# Altium PCB PCB1.PcbDoc (part 2 of 2)
Units mm, origin at the board's own origin, x right, y up, seen from the top; angles counter-clockwise.
Board outline 75.15 x 101.5 mm, 2 copper layers (Top Layer, Bottom Layer); 114 components, 101 nets, 345 pads, 36 vias.
Unrouted connection lines stored in the file: 145.
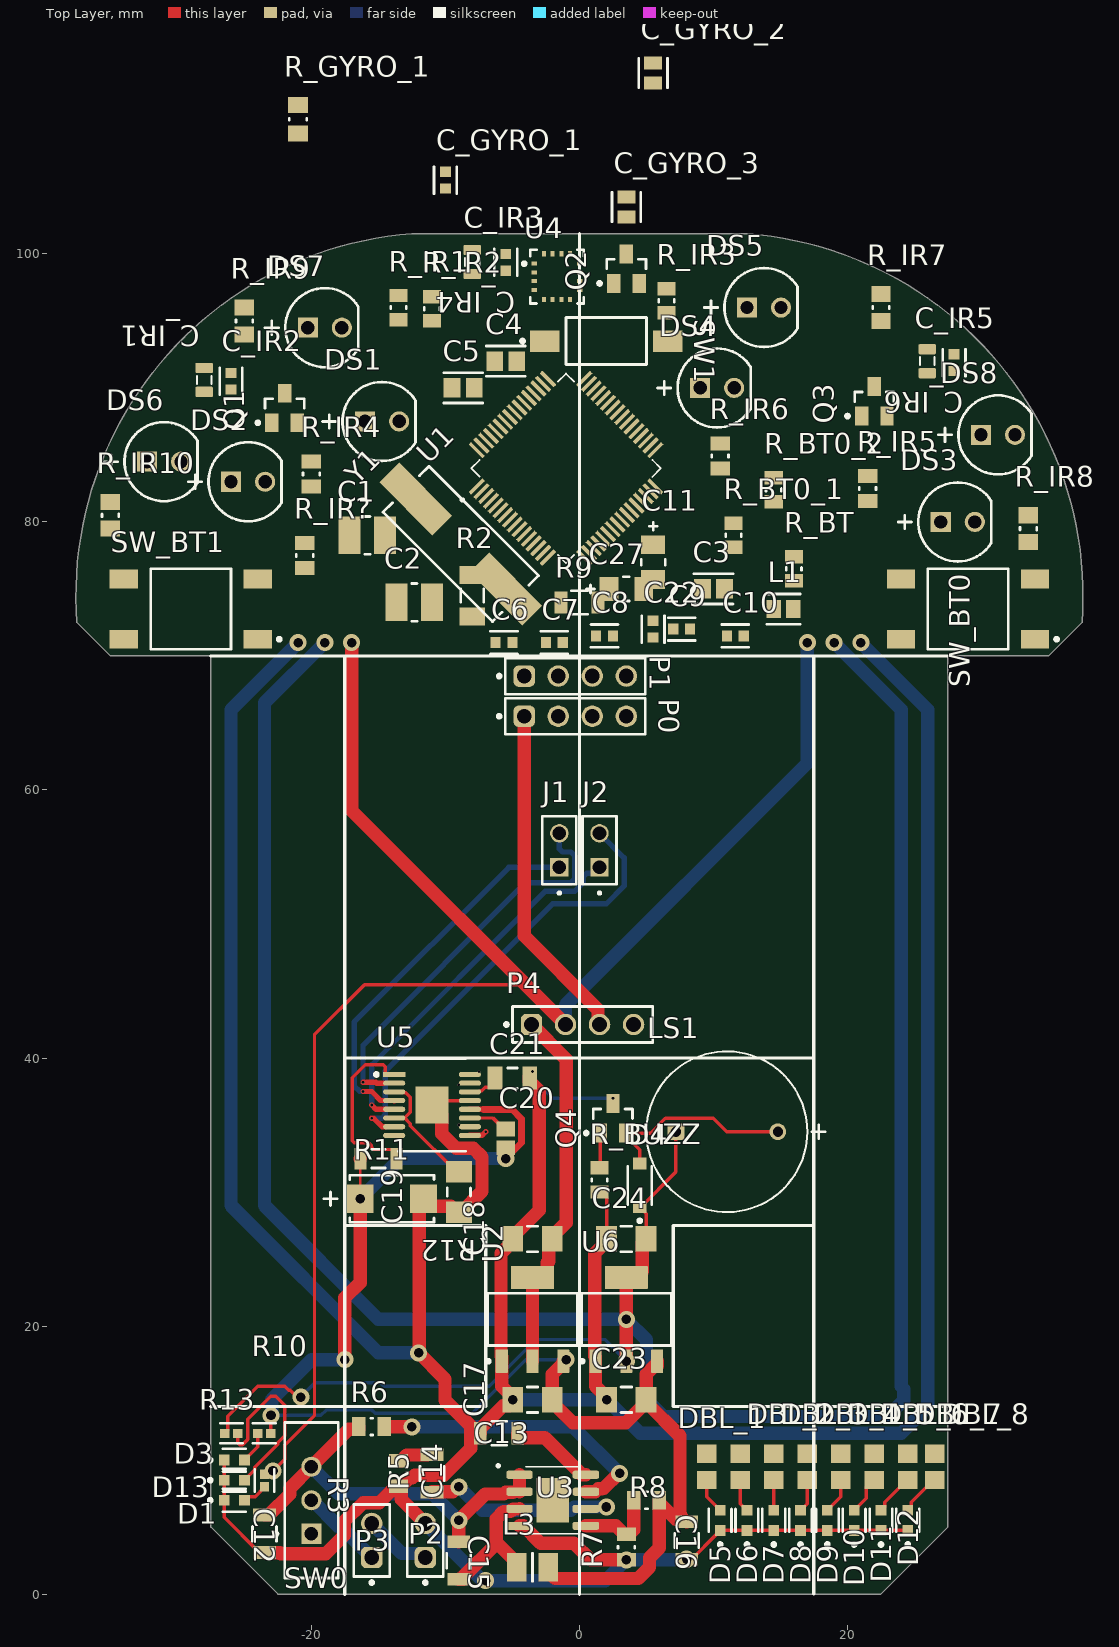
[diagram p0: Top Layer view]

## Via types
v1: diameter 1.27/1.27 (per signal layer), hole 0.711, Top Layer to Bottom Layer, 26 vias
v2: diameter 0.2/0.2 (per signal layer), hole 0.2, Top Layer to Bottom Layer, 10 vias

## Nets (pads, with @x,y where several pads share a name; then routed paths per layer and width w, separated by ;. In a path a pad name is that pad's centre, name@x,y a point inside that pad or via, vN(x,y) a via of type N, cw(c..) or ccw(c..) an arc to the next point about the centre after c; other vN are vias at no path point) (continued)
NetD1_2: (continued)
  Top Layer w0.254: D1.2 -24.727,7.273 -24.206,7.273 -23.5,7.979 R3.2
NetD3_2: D3.2 R10.2 | length 2.4
  Top Layer w0.254: D3.2 -24,11 R10.2
NetD4_2: D4.2 LS1.2 Q4.2 | length 14.9
  Top Layer w0.254: D4.2 4.5,33.15 3.45,34.2 Q4.2 5.311,34.4 6.417,35.506 9.971,35.506 10.977,34.5 LS1.2
NetD5_2: D5.2 DBL_1.1 | length 2.7
  Top Layer w0.254: DBL_1.1 9.5,7.25 D5.2
NetD6_2: D6.2 DBL_2.1 | length 2.5
  Top Layer w0.254: DBL_2.1 12,6.75 D6.2
NetD7_2: D7.2 DBL_3.1 | length 2.3
  Top Layer w0.254: D7.2 DBL_3.1
NetD8_2: D8.2 DBL_4.1 | length 2.5
  Top Layer w0.254: D8.2 17,6.75 DBL_4.1
NetD9_2: D9.2 DBL_5.1 | length 2.7
  Top Layer w0.254: D9.2 19.5,7.25 DBL_5.1
NetD10_2: D10.2 DBL_6.1 | length 2.9
  Top Layer w0.254: D10.2 21.402,7.152 21.402,7.977 21.95,8.525 DBL_6.1
NetD11_2: D11.2 DBL_7.1 | length 3.1
  Top Layer w0.254: D11.2 22.773,6.523 22.773,6.848 24.45,8.525 DBL_7.1
NetD12_2: D12.2 DBL_8.1 | length 3.1
  Top Layer w0.254: D12.2 24.773,6.523 24.773,6.848 26.45,8.525 DBL_8.1
NetD13_2: D13.2 R13.2 | length 13.8
  Top Layer w0.254: R13.2 -25.5,11.283 -25.351,11.134 -25.141,11.134 -24.739,11.536 -24.739,13.043 -23.032,14.749 -22.657,14.749 -22,14.092 -22,11.81 -22.508,11.302 -22.508,11.182 -24.217,9.473 -24.217,9.283 D13.2
NetDS1_2: DS1.2 R_IR4.2
NetDS2_2: DS2.2 R_IR?.2
NetDS3_2: DS3.2 R_IR5.2
NetDS4_2: DS4.2 R_IR6.2
NetLabel18: U1.22
NetLabel19: U1.23
NetLabel20: U1.41
NetLabel23: U1.21 U1.44
NetLabel24: U1.45
NetLabel27: U1.50
NetLabel28: U1.26
NetLabel31: U1.55
NetLabel44: U1.54
NetLabel45: U1.4
NetLabel46: U1.3
NetLabel47: U1.2
NetLabel48: U1.53
NetLabel49: U1.52
NetLabel50: U1.51
NetLabel51: U1.40
NetLabel52: U1.39
NetLabel53: U1.38
NetP2_1: P2.1 P3.2 | length 5.1
  Bottom Layer w1: P3.2 -13.26,3.03 -11.8,3.03 P2.1
NetP3_1: P3.1 SW0.2 | length 6.3
  Bottom Layer w1: SW0.2 -19.934,7 -17.901,4.967 -17.737,4.967 P3.1
NetQ1_2: Q1.2 R_IR4.1
NetQ2_2: Q2.2 R_IR5.1 R_IR?.1
NetQ3_2: Q3.2 R_IR6.1
NetR6_2: R6.2 U3.7 | length 22.1
  Top Layer w1: R6.2 -14.549,12.495 -14.546,12.492 -12.508,12.492 v1(-12.5,12.484) ; U3.7 0.491,7.651 1.189,7.651 1.389,7.851 1.684,7.851 1.721,7.887 1.814,7.887 2.927,9 v1(3,9)
  Bottom Layer w1: v1(-12.5,12.484) -12.484,12.5 -0.5,12.5 v1(3,9)
NetR7_2: R7.2 R8.2 U3.5 | length 6.2
  Top Layer w1: U3.5 2.71,5.095 3.296,4.509 3.296,4.454 3.704,4.454 4.049,4.799 R8.2
NetR11_2: R11.2 U5.1 | length 13
  Top Layer w0.254: U5.1 -14.421,38.775 -14.484,38.838 -14.484,39.351 -14.633,39.5 -16,39.5 -16.958,38.542 -16.958,33.83 -16.809,33.681 -15.742,33.681 -15.519,33.458 -15.519,33.322 -15.37,33.173 -13.973,33.173 -13.65,32.85 R11.2
NetR12_1: R12.1 U5.3 U5.6 | length 9.6
  Top Layer w0.254: U5.6 -13.03,35.525 -12.611,35.106 -12.611,34.936 -9.175,31.5 R12.1 ; U5.3 -13.154,37.475 -13.075,37.396 -13.02,37.396 -12.951,37.396 -12.617,37.062 -12.617,35.938 -12.951,35.604
NetR_BT0_1_2: R_BT0_1.2 SW_BT0.4
NetR_BT0_2_2: R_BT0_2.2 SW_BT0.3
OUT1: J1.01 U5.4 | length 28.3
  Top Layer w0.4: v2(-16.154,37.5) -15.5,37.5 -14.831,36.831 -13.831,36.831 U5.4
  Bottom Layer w0.4: v2(-16.154,37.5) -16.387,37.5 -16.808,37.921 -16.808,42.692 -5.27,54.23 J1.01
OUT2: J1.02 U5.2 | length 30.3
  Top Layer w0.254: U5.2@-14.625,38.125 U5.2
  Top Layer w0.4: v2(-16.154,38.192) -15.192,38.192 -15.125,38.125 U5.2@-14.625,38.125
  Bottom Layer w0.4: v2(-16.154,38.192) -16.154,40.949 -4.012,53.091 -0.627,53.091 -0.361,53.357 -0.361,54.884 -0.361,55.103 -0.627,55.369 -1.266,55.369 -1.5,55.603 J1.02
OUT3: J2.01 U5.5 | length 27.5
  Top Layer w0.4: v2(-15.5,36.5) -15.169,36.169 U5.5@-14.483,36.169
  Bottom Layer w0.4: v2(-15.5,36.5) -15.5,39.5 -2.563,52.437 -0.356,52.437 0.293,53.086 0.293,53.55 0.527,53.784 1.054,53.784 J2.01
OUT4: J2.02 U5.7 | length 34.6
  Top Layer w0.254: U5.7@-14.472,34.881 -13.831,34.881 U5.7
  Top Layer w0.4: v2(-15.5,35.5) -15.349,35.5 -14.73,34.881 U5.7@-14.472,34.881
  Bottom Layer w0.4: v2(-15.5,35.5) -14.734,35.5 -14.5,35.734 -14.5,39 -2,51.5 2,51.5 3.334,52.834 3.334,54.936 J2.02
PB2: R9.1 U1.28
R_RV: DS8.2 R_IR8.2 U1.9
RF_EM: Q3.1 R_IR3.1 U1.37
RF_RV: DS5.2 R_IR7.2 U1.11
RX: P1.3 U1.43
SCL: U1.58 U4.2
SDA: U1.59 U4.3
SWCLK: P0.3 U1.49
SWDIO: P0.2 U1.46
TX: P1.2 U1.42
V33: C24.1 C_GYRO_1.1 C_IR1.1 C_IR2.2 C_IR3.2 C_IR4.1 C_IR5.2 C_IR6.1 D4.1 DS1.1 DS2.1 DS3.1 DS4.1 DS5.1 DS6.1 DS7.1 DS8.1 LS1.1 R13.1 SW_BT0.1 SW_BT0.2 SW_BT1.2 U4.1 U4.5 U4.15 U4.16 U6.2 U6.4 | length 214.5
  Top Layer w0.254: R13.1 -26.448,12 -26.239,12.209 -26.239,13.261 -24,15.5 -22,15.5 -21.702,15.202 -21.573,15.202 -21.065,14.694 v1(-20.79,14.694) ; D4.1 D4.1@4.57,28.865 ; C24.1 4.976,28.389 4.883,28.482 4.883,28.552 D4.1@4.57,28.865 ; LS1.1 7.2,31.495 D4.1@4.57,28.865
  Top Layer w1: v1(3.5,17.375) v1(3.5,20.5) U6.4 4.225,23.625 4.698,24.098 4.698,26.223 C24.1
  Bottom Layer w0.254: v1(-20.79,14.694) -20.79,14.71 -19.735,15.765 -14.854,15.765 -14.589,15.5 -6.718,15.5 -3.218,19 1.875,19 v1(3.5,17.375)
  Bottom Layer w1: v1(-19,71) -23.5,66.5 -23.5,29 -15,20.5 v1(3.5,20.5) 3.5,20.481 5,18.981 5,14.5 6.246,13.254 23,13.254 24.209,14.463 24.209,15.291 24,15.5 24,66 v1(19,71)
VDD3: C6.1 C7.1 C8.1 C9.1 L1.1
VDD33: C4.1 C5.1 P1.1 P4.2 R2.1 R3.1 U1.14 U1.19 U1.32 U1.48 U1.64 | length 122.2
  Top Layer w0.254: v1(-22.867,9.196) -22,10.063 -22,11.092 -19.774,13.318 -19.774,41.726 -16.04,45.46 -4,45.46
  Top Layer w1: v1(-17,71) -17,58.46 P4.2
  Bottom Layer w1: P4.2 -1.04,43.96 17,62 v1(17,71)
VDD33_OUT: C18.1 P4.1 U2.2 U2.4 | length 27.7
  Top Layer w1: P4.1 -1,39.92 -1,27.7 -2.302,26.398 -2.302,24.823 -2.4,24.725 -2.4,24 -2.775,23.625 U2.4 U2.2
VDD33ST: P0.1 P4.3 | length 25.3
  Top Layer w1: P0.1 -4.12,49.12 1.385,43.615 1.385,42.615 P4.3
VDDA: C10.1 C22.1 L1.2 U1.56
VIN74: C12.1 C15.1 R6.1 SW0.3 U3.1 U3.2 | length 30.6
  Top Layer w1: C12.1 -23.175,5.9 -21.623,7.452 -21.623,7.877 SW0.3 -17.204,12.296 -16.454,12.296 -16.451,12.299 R6.1 ; C15.1 v1(-9,5.5) -7.033,7.467 -5.65,7.467 -5.514,7.603 U3.2@-4.96,7.603 ; U3.2 U3.1
  Bottom Layer w1: SW0.3 -17.978,7.478 -10.978,7.478 v1(-9,5.5)
VOUT5: C16.1 C17.1 C19.2 C20.1 C23.1 L3.2 R8.1 R10.1 R11.1 U2.3 U5.12 U6.3 | length 109.3
  Top Layer w0.2: v1(-16.36,29.5) R11.1@-16.36,32.49
  Top Layer w0.254: R10.1 -23.029,12.013 -23.029,13.315 v1(-23.016,13.329)
  Top Layer w0.4: U5.12 -7.175,36.175
  Top Layer w0.5: -7.175,36.175 -7.156,36.156 -5.018,36.156 -4.321,35.459 -4.321,33.679 v1(-5.5,32.5)
  Top Layer w1: v1(-17.5,17.5) -17.5,22.106 -16.36,23.246 v1(-16.36,29.5) ; R11.1@-16.355,32.495 R11.1 ; L3.2 -2.324,1.674 -1.81,1.16 4.385,1.16 5.224,1.999 5.224,2.715 5.951,3.442 R8.1 5.951,6.799 C16.1@7.175,5.575 ; U2.3 -1.2,17.05 -1.25,17 -1.438,17 -2.024,16.414 C17.1 -2.024,14.324 -0.493,12.793 3.444,12.793 4.976,14.324 7.5,11.8 7.5,5.9 C16.1@7.65,5.75 ; C23.1 4.976,16.414 5.562,17 5.75,17 5.8,17.05 U6.3 ; C16.1@7.5,5.425 7.975,5.425 C16.1
  Bottom Layer w0.254: v1(-23.016,13.329) -23,13.345 -19.296,13.345 -18.908,13.733 -15.479,13.733 -15.246,13.5 -8,13.5 -4,17.5 v1(-1,17.5)
  Bottom Layer w1: v1(-23.016,13.329) -22.964,13.38 -22.964,14.516 -19.98,17.5 v1(-17.5,17.5) ; v1(-16.36,29.5) -13.36,32.5 v1(-5.5,32.5)
pads on no net: P4.4 SW0.1 SW_BT1.1 SW_BT1.4 U1.1 U1.13 U3.9 U4.6 U5.8

## Silkscreen, mask and mechanical layers (free items; w line width, h text height)
Top Overlay:
  lines w0.254: -27.5,14 -17.5,14 -7,14 -7,27.5 -17.5,27.5 ; -27.5,70 27.5,70 ; -17.5,0 -17.5,70 ; -17.5,40 17.5,40 ; 0,0 0,70 0,101.5 ; 17.479,0.021 17.479,69.846 ; 17.479,14 27.5,14 ; 17.5,14 7,14 7,27.5 17.5,27.5
Mechanical 1:
  lines w0.254: -37.5,72.5 cw(c-10.5,74.5) -12.5,101.5 12.5,101.5 cw(c10.5,74.5) 37.5,72.5 35,70 27.5,70 27.5,7.905 27.5,5 22.5,0 12.5,0 10,0 -22.5,0 -27.5,5 -27.5,70 -32.5,70 -35,70 -37.5,72.5